# Altium PCB 毛巾架 主板-PCB.PcbDoc
Units mm, origin at the board's own origin, x right, y up, seen from the top; angles counter-clockwise.
Board outline 73.78 x 43 mm, 2 copper layers (Top Layer, Bottom Layer); 75 components, 56 nets, 224 pads, 69 vias.
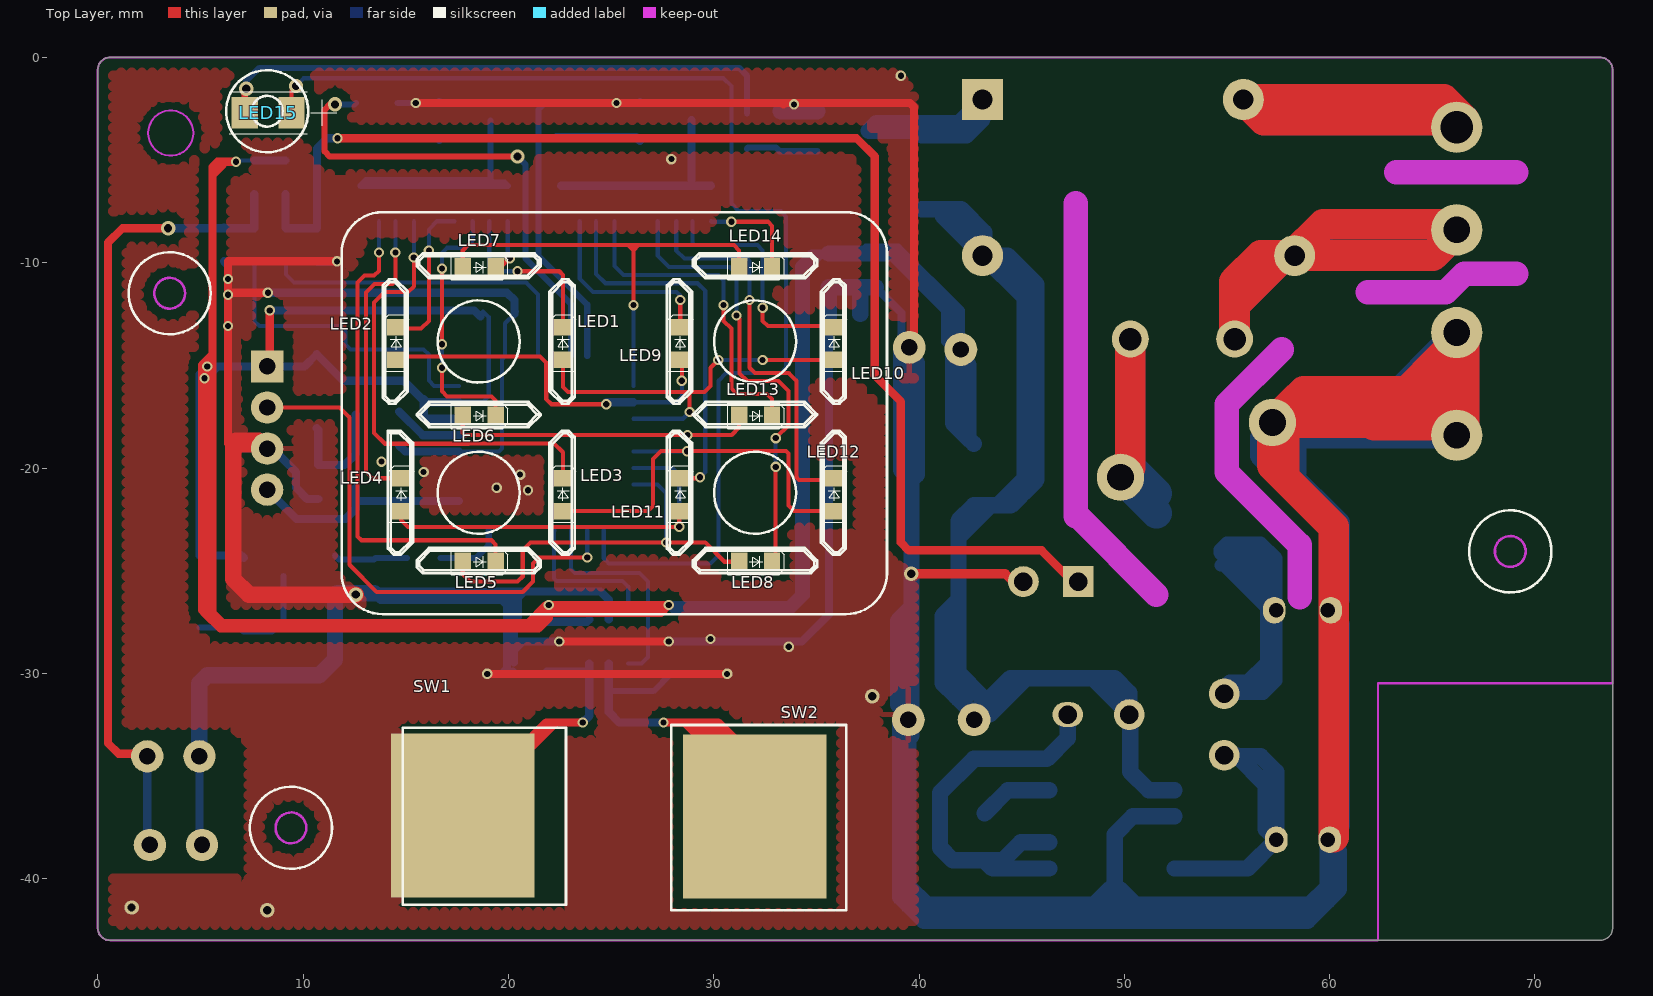
[diagram p0: Top Layer view]
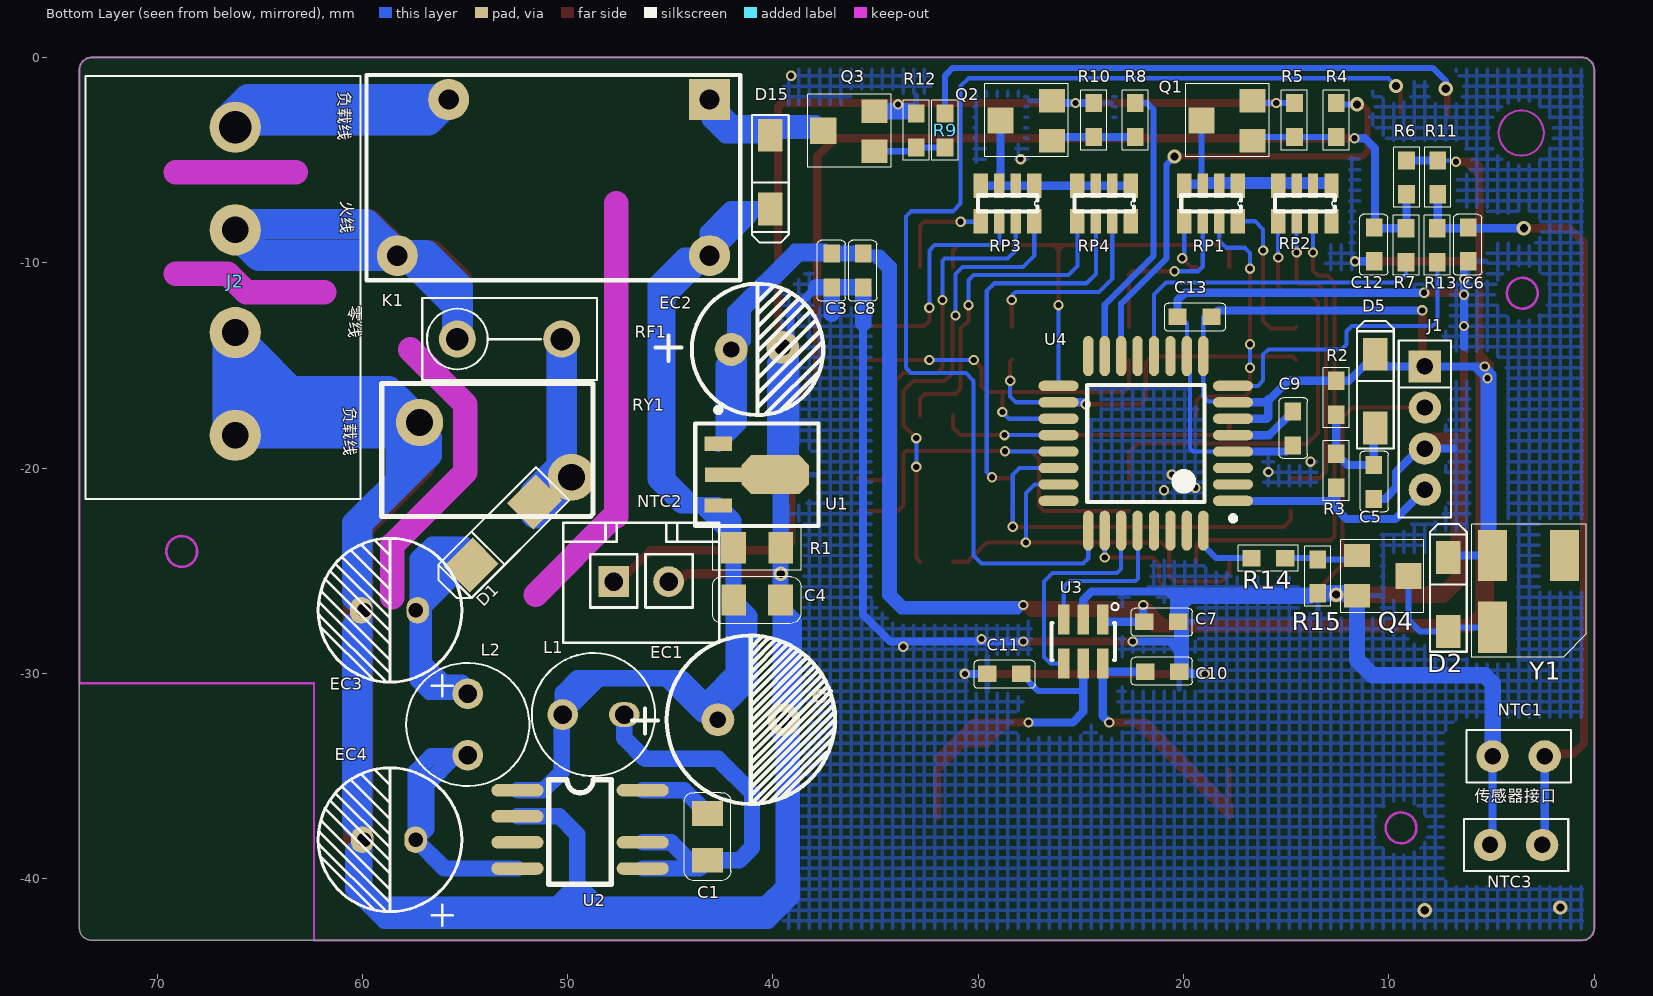
[diagram p1: Bottom Layer view, seen from below]
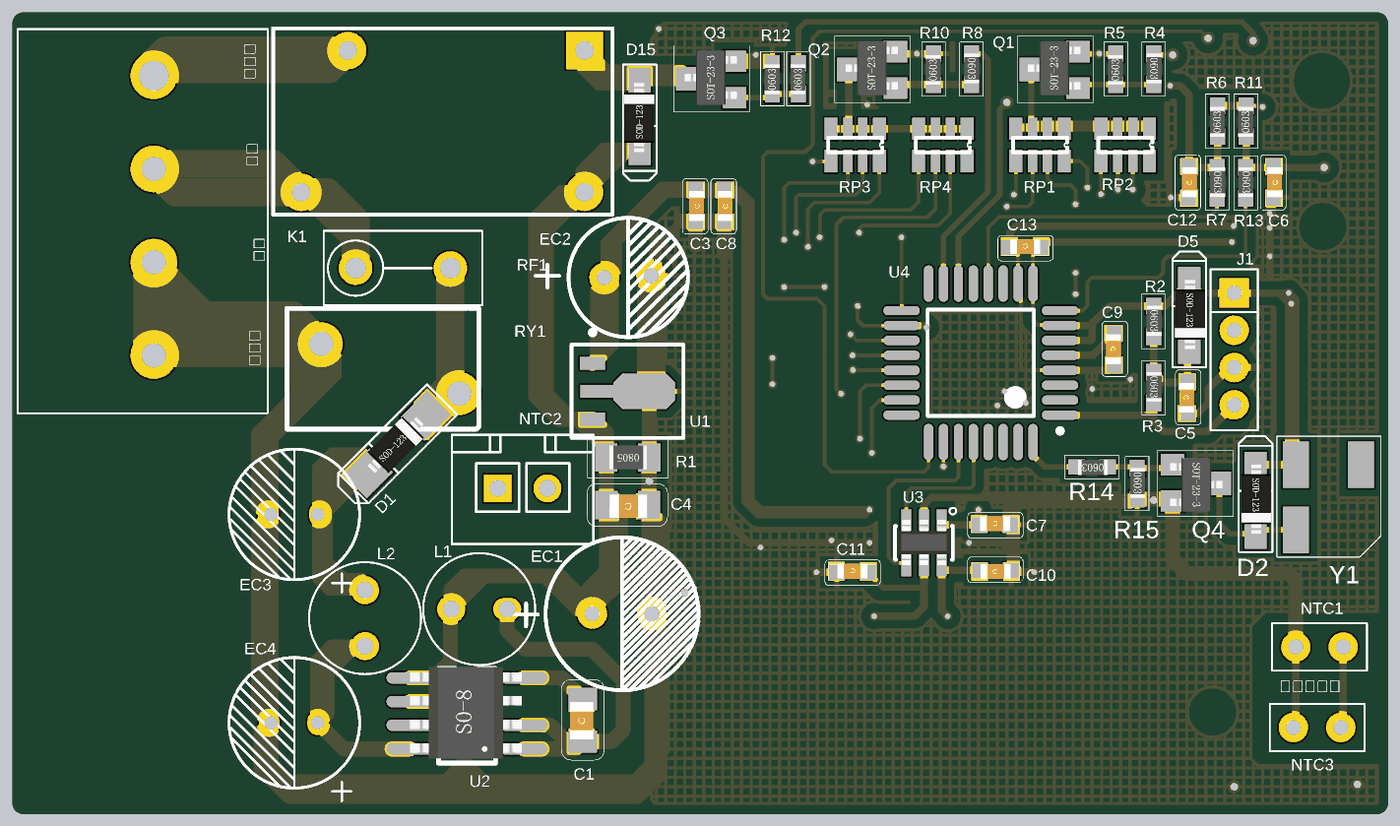
[diagram p2: 3D render of the assembled board from below, using the file's embedded part models]

## Layer stack, top to bottom
Top Layer: signal copper 0.0356
Dielectric: dielectric 0.32, FR-4, Dk 4.8
Bottom Layer: signal copper 0.0356

## Board outline
0,-42.4 ccw(c0.6,-42.4) 0.6,-43 73.178,-43 ccw(c73.178,-42.4) 73.778,-42.4 73.778,-0.6 ccw(c73.178,-0.6) 73.178,0 0.6,0 ccw(c0.6,-0.6) 0,-0.6

## Design rules (kind name [scope] priority, off if disabled: settings)
Clearance Clearance_1 [InPolygon] p1: gap=0.45
Clearance [All] p2: gap=0.2
HoleSize [All] p1 off: absolutevalues=TRUE maxlimit=2.54 minlimit=0.025 maxpercent=80.000 minpercent=20.000
HoleToHoleClearance [All] p1 off: gap=0.254 allowstackedmicrovias=TRUE
LayerPairs [All] p1 off: enforce=TRUE
MinimumSolderMaskSliver [All] p1 off: minsoldermaskwidth=0.254
NetAntennae [All] p1 off: netantennaetolerance=0
PolygonConnect PolygonConnect_1 [IsVia] p1: connectstyle=Direct reliefconductorwidth=0.254 reliefentries=4 polygonreliefangle="90 Angle"
PolygonConnect [All] p2: connectstyle=Relief reliefconductorwidth=0.254 reliefentries=4 polygonreliefangle="90 Angle"
RoutingVias [All] p1: holewidth=0.711 width=1.27 viastyle="Through Hole" minholewidth=0.711 minwidth=1.27 maxholewidth=0.711 maxwidth=1.27
SilkToSilkClearance [All] p1 off: silktosilkclearance=0.254
SilkscreenOverComponentPads [All] p1 off: minsilkscreentomaskgap=0.254
SolderMaskExpansion [All] p1: expansion=0.102
Width [All] p1: maxlimit=1.5 minlimit=0.17 preferedwidth=0.4
21 further rules are at their usual default settings.

## Components (designator, comment, footprint, x,y, rotation, side; value= is the part's Value field where it differs from the comment)
C1 "1uF/0805" CAP/SMT/0805C 43.18,-39.116 r90 bottom
C3 "0.1uF/0603" CAP/SMT/0603C 37.084,-11.176 r90 bottom
C4 "1uF/0805" CAP/SMT/0805C 39.624,-26.416 r0 bottom
C5 "0.1uF/0603" CAP/SMT/0603C 10.795,-19.876 r270 bottom
C6 "0.1uF/0603" CAP/SMT/0603C 6.096,-9.906 r90 bottom
C7 "1uF/0603" CAP/SMT/0603C 20.289,-27.432 r0 bottom
C8 "0.1uF/0603" CAP/SMT/0603C 35.56,-11.176 r90 bottom
C9 "0.1uF/0603" CAP/SMT/0603C 14.732,-17.272 r270 bottom
C10 "0.1uF/0603" CAP/SMT/0603C 21.844,-29.972 r180 bottom
C11 "0.1uF/0603" CAP/SMT/0603C 27.94,-29.972 r0 bottom
C12 "0.1uF/0603" CAP/SMT/0603C 10.668,-9.906 r90 bottom
C13 "0.1uF/0603" CAP/SMT/0603C 18.669,-12.573 r0 bottom
D1 "1N4007-SOD123" D/SMT/SOD123 54.864,-24.892 r135 bottom
D2 "1N4148/SOD-123" D/SMT/SOD-123 7.112,-26.162 r270 bottom
D5 "1N4148/SOD-123" D/SMT/SOD-123 10.668,-16.256 r270 bottom
D15 "1N4148/SOD-123" D/SMT/SOD-123 40.132,-5.588 r90 bottom
EC1 "AEC/220uF/25V" CAP/DIP/330UF/25V 42.672,-32.258 r180 bottom
EC2 "100uF/25V" CAP/DIP/100uF/25V 42.037,-14.224 r180 bottom
EC3 "2.2uF/400V" CAP/DIP/2.2UF/400V/2.5mm#1 57.404,-26.924 r90 bottom
EC4 "2.2uF/400V" CAP/DIP/2.2UF/400V/2.5mm#2 57.404,-38.1 r90 bottom
J1 "CON/DIP/1X4PIN/2MM" CON/DIP/1×4PIN/2.0MM 8.255,-15.05 r270 bottom
J2 "1X4PIN" CON/DIP/1×4PIN/5.0MM/WJ103-4P 66.189,-10.9 r270 bottom
K1 "HF32F/012-HSL" RELAY/HF32F-012-HSL 58.293,-9.652 r90 bottom
L1 "1mH" L/DIP/1mH#1 47.244,-32.004 r0 bottom
L2 "1mH" L/DIP/1mH#2 54.864,-30.988 r270 bottom
LED1 "WEJT61RC-871/0603" D/SMT/LED/0603 22.606,-13.207 r270 top
LED2 "WEJT61RC-871/0603" D/SMT/LED/0603 14.478,-13.207 r270 top
LED3 "WEJT61RC-871/0603" D/SMT/LED/0603 22.606,-20.573 r270 top
LED4 "WEJT61RC-871/0603" D/SMT/LED/0603 14.732,-20.573 r270 top
LED5 "WEJT61RC-871/0603" D/SMT/LED/0603 19.304,-24.511 r180 top
LED6 "WEJT61RC-871/0603" D/SMT/LED/0603 19.304,-17.399 r180 top
LED7 "WEJT61RC-871/0603" D/SMT/LED/0603 19.304,-10.16 r180 top
LED8 "WEJT61RC-871/0603" D/SMT/LED/0603 32.766,-24.511 r180 top
LED9 "WEJT61RC-871/0603" D/SMT/LED/0603 28.321,-13.207 r270 top
LED10 "WEJT61RC-871/0603" D/SMT/LED/0603 35.814,-13.207 r270 top
LED11 "WEJT61RC-871/0603" D/SMT/LED/0603 28.321,-20.573 r270 top
LED12 "WEJT61RC-871/0603" D/SMT/LED/0603 35.814,-20.573 r270 top
LED13 "WEJT61RC-871/0603" D/SMT/LED/0603 32.766,-17.399 r180 top
LED14 "WEJT61RC-871/0603" D/SMT/LED/0603 32.766,-10.16 r180 top
LED15 "BL-HUF35A-TRB高亮红" D/SMT/LED/0805 7.112,-2.54 r0 top
NTC1 "10K/±1%/B值:3380K/0805" Sensor/S_NTC_DIP 2.413,-34.036 r0 bottom
NTC2 "10K/±1%/B值:3380K/0805" CON/DIP/1×2PIN/2.54MM/插件端子 46.736,-26.67 r90 bottom
NTC3 "10K/±1%/B值:3380K/0805" Sensor/S_NTC_DIP 2.54,-38.354 r0 bottom (schematic designator NTC1)
Q1 "NPN_SS8050" BJT/SMT/SOT-23 16.637,-4.064 r90 bottom
Q2 "NPN_SS8050" BJT/SMT/SOT-23 26.416,-4.064 r90 bottom
Q3 "NPN_SS8050" BJT/SMT/SOT-23 35.052,-4.572 r90 bottom
Q4 "NPN_BC817" BJT/SMT/SOT-23 11.557,-24.257 r270 bottom
R1 "4.7K//1%/0805" 0805R 39.624,-23.876 r0 bottom
R2 "10K/0603" 0603R 12.573,-16.574 r270 bottom
R3 "430R/0603" 0603R 12.573,-20.13 r270 bottom
R4 "10K/0603" 0603R 12.573,-3.048 r270 bottom
R5 "10K/0603" 0603R 14.605,-3.048 r90 bottom
R6 "10K/0603" 0603R 9.144,-5.842 r90 bottom
R7 "430R/0603" 0603R 9.167,-9.144 r270 bottom
R8 "10K/0603" 0603R 22.352,-3.048 r270 bottom
R9 "4.7K/0603" 0603R 31.623,-3.556 r90 bottom
R10 "10K/0603" 0603R 24.384,-3.048 r90 bottom
R11 "10K/0603" 0603R 7.62,-5.842 r90 bottom
R12 "4.7K/0603" 0603R 33.02,-3.556 r90 bottom
R13 "430R/0603" 0603R 7.643,-9.144 r270 bottom
R14 "10K/0603" 0603R 15.875,-24.384 r0 bottom
R15 "10K/0603" 0603R 13.462,-25.273 r270 bottom
RF1 "100R/2W" FUSE/3.15A 50.292,-13.716 r0 bottom
RP1 "1K/0603/1/8W/±5%" 0603R*4 18.669,-7.112 r0 bottom
RP2 "1K/0603/1/8W/±5%" 0603R*4 14.097,-7.112 r0 bottom
RP3 "1K/0603/1/8W/±5%" 0603R*4 28.575,-7.112 r0 bottom
RP4 "1K/0603/1/8W/±5%" 0603R*4 23.876,-7.112 r0 bottom
RY1 "TDK471KD10" RES/RY/TDK471KD10 57.912,-17.78 r180 bottom
SW1 "TOUCH" SWITCH/TOUCH-2#1 17.907,-34.163 r90 top
SW2 "TOUCH" SWITCH/TOUCH-2#2 32.131,-33.909 r90 top
U1 "L78L05" SOT-89-3L(78L05) 42.672,-18.796 r270 bottom
U2 "PN8507" SOP-7 49.784,-38.1 r180 bottom
U3 "BS812" SOT23-6 24.892,-28.448 r180 bottom
U4 "STM8S005K6T6TR" LQFP32 21.844,-18.796 r0 bottom locked
Y1 "SYT-0502" SYT-5020 4.953,-24.257 r0 bottom

## Footprints (in the part's own frame and the unit in brackets; to place one, negate y for a bottom-side part, rotate by r counter-clockwise, add the part's x,y. Pads: shape width x height; smd on the part's side, far side on the other; paste and mask are expansions set on the pad)
0603R [mil]
  rect 35x32 smd: 1(-32.5,0) 2(32.5,0)
  silkscreen extent -58,-25 58,25, body extent -33,-15 30,16, height 18
0603R*4 [mm]
  rect 0.7x1.2 smd: 1(-1.3,-0.865) 4(1.3,-0.865) 5(1.3,0.865) 8(-1.3,0.865)
  rect 0.5x1.2 smd: 2(-0.4,-0.865) 3(0.4,-0.865) 6(0.4,0.865) 7(-0.4,0.865)
  silkscreen extent -1.45,-0.4 1.45,0.4
0805R [mm]
  rect 1.2x1.524 smd: 1(0,0) 2(2.3,0)
  silkscreen extent -1,-1.1 3.3,1.1, body extent 0.13,-0.64 2.13,0.62, height 0.55
BJT/SMT/SOT-23 [mm] "transistor 1base 2emitter 3collector"
  rect 1.143x1.27 smd: 1(0,0) 2(1.95,0)
  rect 1.27x1.27 smd: 3(1,2.5)
  silkscreen extent -0.78,-0.8 2.78,3.26, body extent -0.38,-0.13 2.52,2.67, height 1.2
CAP/DIP/2.2UF/400V/2.5mm#1 [mm] "R=4.1MM  脚间距:3.2mm"
  oval 1.3x1.1 hole 0.7 copper offset 0,-0.1: 1(0,0)
  oval 1.3x1.1 hole 0.7 copper offset 0,0.15: 2(0,2.5)
  silkscreen extent -4.19,-2.25 3.5,4.75
CAP/DIP/2.2UF/400V/2.5mm#2 [mm] "R=4.1MM  脚间距:3.2mm"
  oval 1.3x1.1 hole 0.7: 1(0,0)
  oval 1.3x1.1 hole 0.7 copper offset 0,0.1: 2(0,2.5)
  silkscreen extent -4.19,-2.25 3.5,4.75
CAP/DIP/100uF/25V [mm]
  round 1.6 hole 0.8: 1(0,0) 2(2.515,0.102)
  silkscreen extent -3.68,-3.19 4.49,3.2
CAP/DIP/330UF/25V [mm] "R=4.1MM  脚间距:3.2mm"
  round 1.6 hole 0.8: 1(-0.009,0.004) 2(3.191,0.004)
  silkscreen extent -4.19,-4.1 5.69,4.1
CAP/SMT/0603C [mil]
  rect 35x32 smd: 1(-1,1.97) 2(64,1.97)
  silkscreen extent -28,-24 89,30, body extent -20,-20 82,19, height 35
CAP/SMT/0805C [mm]
  rect 1.2x1.524 smd: 1(0.01,0.01) 2(2.296,0.01)
  silkscreen extent -0.99,-1.13 3.32,1.15, body extent -0.38,-0.64 2.62,0.76, height 0.93
CON/DIP/1×2PIN/2.54MM/插件端子 [mm]
  rect 1.5x1.5 hole 0.9: 1(1.143,1.016)
  round 1.5 hole 0.9: 2(1.143,-1.651)
  silkscreen extent -1.84,-4.13 4.01,3.47
CON/DIP/1×4PIN/2.0MM [mil]
  rect 62x62 hole 31.5 mask+4: 1(0,0)
  round 62 hole 31.5 mask+4: 2(78.74,0) 3(157.48,0) 4(236.22,0)
  silkscreen extent -50,-50 290,50
CON/DIP/1×4PIN/5.0MM/WJ103-4P [mm]
  round 2.5 hole 1.6: 1(-7.5,0)
  round 2.5 hole 1.3: 2(-2.5,0) 3(2.5,0) 4(7.5,0)
  silkscreen extent -10,-7.3 10.6,6.1
D/SMT/LED/0603 [mm]
  rect 0.8x0.9 smd: 1(-0.076,0.051) 2(1.524,0.051)
  silkscreen extent -0.68,-0.55 2.07,0.68
D/SMT/LED/0805 [mil]
  rect 50x60 smd: 1(2,-6) 2(92,-6)
  silkscreen extent -28,-46 178,34
D/SMT/SOD123 [mm]
  rect 2x1.8 smd: 1(0.229,0) 2(4.597,0)
  silkscreen extent -1.4,-1.14 5.84,1.14, body extent 0.21,-2.11 4.51,2.19, height 1.2
D/SMT/SOD-123 [mm]
  rect 1.6x1.2 smd: 1(-1.8,0) 2(1.8,0)
  silkscreen extent -3.43,-0.9 2.78,0.9, body extent -1.91,-0.76 1.79,0.84, height 1.2
FUSE/3.15A [mm]
  round 1.8 hole 1.1: 1(0,0) 2(5.08,0)
  silkscreen extent -1.71,-2 6.79,2
L/DIP/1mH#1 [mm]
  oval 1.5x1.2 hole 0.9: 1(0,0)
  round 1.5 hole 0.9: 2(3,0)
  silkscreen extent -1.5,-3 4.5,3
L/DIP/1mH#2 [mm]
  round 1.5 hole 0.9: 1(0,0) 2(3,0)
  silkscreen extent -1.5,-3 4.5,3
LQFP32 [mm]
  oval 1.95x0.5 smd: 1(-4.25,2.8) 2(-4.25,2) 3(-4.25,1.2) 4(-4.25,0.4) 5(-4.25,-0.4) 6(-4.25,-1.2) 7(-4.25,-2) 8(-4.25,-2.8) 17(4.25,-2.8) 18(4.25,-2) 19(4.25,-1.2) 20(4.25,-0.4) 21(4.25,0.4) 22(4.25,1.2) 23(4.25,2) 24(4.25,2.8)
  oval 0.5x1.95 smd: 9(-2.8,-4.25) 10(-2,-4.25) 11(-1.2,-4.25) 12(-0.4,-4.25) 13(0.4,-4.25) 14(1.2,-4.25) 15(2,-4.25) 16(2.8,-4.25) 25(2.8,4.25) 26(2,4.25) 27(1.2,4.25) 28(0.4,4.25) 29(-0.4,4.25) 30(-1.2,4.25) 31(-2,4.25) 32(-2.8,4.25)
  silkscreen extent -4.37,-2.85 2.85,3.77
RELAY/HF32F-012-HSL [mm] "L×W×H（20.5*7.2*15.3MM）"
  round 2 hole 0.991: 1(7.6,-2.5) 2(0,0) 3(0,-15.2)
  rect 2x2 hole 0.991: 4(7.6,-15.2)
  silkscreen extent -1.2,-16.7 8.8,1.5
RES/RY/TDK471KD10 [mm]
  round 2.3 hole 1.3: 1(0.7,0) 2(8.1,-2.667)
  silkscreen extent -1.14,-4.57 9.14,1.91
Sensor/S_NTC_DIP [mil] "插件NTC封装 脚间距2.54mm"
  round 62 hole 31.5 mask+4: 1(0,0) 2(100,0)
  silkscreen extent -50,-50 150,50
SOP-7 [mil]
  oval 100x24 smd: 1(-104.73,94.83) 2(-104.73,44.83) 3(-104.73,-5.17) 4(-104.73,-55.17) 5(135.27,-55.17) 6(135.27,-5.17) 7(135.27,94.83)
  silkscreen extent -45,-85 75,115, body extent -105,-75 131,118, height 67
SOT23-6 [mm] "SOT-23/SC-74A; 5 Leads; Body 3.1 x 3 mm, inc. leads (LxW max)"
  rect 0.55x1.45 smd: 1(0.95,1.075) 2(0,1.075) 3(-0.95,1.075) 4(-0.95,-1.075) 5(0,-1.075) 6(0.95,-1.075)
  silkscreen extent -1.55,-0.9 1.72,1.88, body extent -1.4,-1.19 1.4,1.23, height 1.08
SOT-89-3L(78L05) [mm] "SOT-89; Body 4.6 x 4.25 mm, inc. leads (LxW max)"
  rect 0.7x1.35 smd: 1(0.024,0.009) 3(3.024,0.009)
  rect 0.7x1.8 smd: 2(1.524,0.254)
  oct 1.9x3.3 smd: 2(1.524,2.785)
  silkscreen extent -1.75,-1.12 4.02,4.88
SWITCH/TOUCH-2#1 [mm]
  rect 8x7 smd: 1(-2.754,0.127)
  silkscreen extent -7.11,-4.9 1.52,3.05
SWITCH/TOUCH-2#2 [mm]
  rect 8x7 smd: 1(-3.054,0.127)
  silkscreen extent -7.62,-4.32 1.4,4.19
SYT-5020 [mm]
  rect 1.4x2.5 smd: 1(0,0) 2(0,3.5) 3(-3.5,0)
  silkscreen extent -4.57,-1.52 1.02,4.95

## Part data
C1 C4: library part CAP/CAP/SMT/0805C
C3 C5 C6 C7 C8 C9 C10 C11 C12 C13: library part CAP/CAP/SMT/0603C
D1: library part D/D/SMT/1N4007-SOD123
D2 D5 D15: library part D/D/SMT/1N4148/SOD-123, "VR=75V T(-65-175)P(0.5W)VF=0.6V"
EC1: library part CAP/AEC/DIP/330uF/25V
EC2: library part CAP/AEC/DIP/100uF/25V
EC3 EC4: library part CAP/AEC/DIP/2.2uF/400V
J1: "Connector"
J2: library part CON/DIP/1X4PIN/5.08MM, "Connector"
K1: library part RELAY/GENERAL/DIP/HF32F/012-HSL
L1 L2: library part L/L/DIP/JYGX68-1.0mH/300mA, "工字电感"
LED1 LED2 LED3 LED4 LED5 LED6 LED7 LED8 LED9 LED10 LED11 LED12 LED13 LED14: library part D/LED/SMT/WEJT61RC-871/0603
LED15: library part D/LED/SMT/BL-HUF35A-TRB高亮红/0805
NTC1 NTC2 NTC3: library part SENSOR/NTC_SMD, "3380(10K)"
Q1 Q2: library part BJT/NPN/SMT/SS8050/SOT-23, "Vce25V/Vcb40V/Veb5V/Ic1.5V/Pd300mW"
Q3: library part BJT/NPN/SMT/SS8050/SOT-23
Q4: library part BJT/NPN/SMT/BC817/SOT-23
R1: library part RES/RES/SMT/0805
R2 R3 R4 R5 R6 R7 R8 R9 R10 R11 R12 R13 R14 R15: library part RES/RES/SMT/0603
RF1: library part FUSE/FUSE/DIP/3.15A
RP1 RP2 RP3 RP4: library part "RES /PACKS/SMT/0603*4", "Isolated Resistor Network"
RY1: library part RES/RY/DIP/TDK471KD10
SW1 SW2: library part SWITCH/TOUCH
U1: library part IC/POWER/SMT/L78L05/SOT-89, "5V三端稳压器 output imax 0.1A"
U2: library part IC/POWER/SMT/PN8507/SOP-8
U3: library part IC/POWER/SMT/BS812
U4: library part MCU/SMT/STM8S005K6T6TR/LQFP32
Y1: library part OTHER/BEER/SYT-0502

## Via types
v1: diameter 0.5, hole 0.3, Top Layer to Bottom Layer, tented both sides, 59 vias
v2: diameter 0.7, hole 0.4, Top Layer to Bottom Layer, tented both sides, 10 vias

## Nets (pads, with @x,y where several pads share a name; then routed paths per layer and width w, separated by ;. In a path a pad name is that pad's centre, name@x,y a point inside that pad or via, vN(x,y) a via of type N, cw(c..) or ccw(c..) an arc to the next point about the centre after c; other vN are vias at no path point)
+5V: C3.2 C7.2 C8.2 C13.1 D2.1 D5.1 EC2.1 J1.1 R2.1 R6.2 R11.2 U1.1 U3.1 U4.6 U4.7 U4.9 Y1.1 | length 253.3
  Top Layer w0.4: 5.207,-26.162 5.207,-27.051 ; v1@5.319,-15.05 5.207,-15.162 v1(5.207,-15.621) ; 5.588,-15.24 v1(5.207,-15.621) ; 5.588,-14.478 5.08,-14.986 5.08,-15.875 ; 5.588,-5.715 6.096,-5.207 6.096,-5.08 ; v1(6.731,-5.08) 6.096,-5.08 ; J1.1 8.382,-14.923 v1(8.382,-12.319) ; 21.082,-27.813 21.971,-26.924 ; 21.971,-27.051 27.432,-27.051 v1(27.813,-26.67) 22.479,-26.67 ; 5.08,-15.875 5.334,-15.875 ; 5.08,-15.875 5.08,-15.304 ; 5.08,-15.304 v1(5.334,-15.05) 5.334,-15.875 ; 5.08,-15.304 5.08,-26.924 5.207,-27.051 ; 5.207,-27.051 5.969,-27.813 19.05,-27.813 ; 5.207,-26.67 v1(5.207,-15.621) ; 5.207,-26.67 5.588,-27.051 5.588,-15.621 ; 5.207,-26.67 6.096,-27.559 19.05,-27.559 ; 5.334,-15.875 5.588,-15.621 ; 5.588,-15.621 5.588,-9.398 5.588,-5.334 5.842,-5.08 6.096,-5.08 ; 19.05,-27.813 18.796,-27.813 19.05,-27.559 ; 19.05,-27.813 21.463,-27.813 21.971,-27.305 21.971,-26.924 ; 19.05,-27.559 20.955,-27.559 21.844,-26.67 22.479,-26.67 ; 21.971,-26.924 v1(21.971,-26.67) 22.479,-26.67
  Bottom Layer w0.2: v1(6.731,-5.08) 6.794,-5.016 R11.2 ; U4.7 17.562,-16.764 18.796,-16.764 19.044,-16.516 U4.9 19.044,-12.642 C13.1@18.771,-12.369
  Bottom Layer w0.4: 5.08,-15.304 v1(5.334,-15.05) ; v1@5.334,-15.558 5.842,-15.05 ; D2.1 7.007,-24.257 Y1.1 ; R11.2 R6.2 ; v1(8.382,-12.319) 18.34,-12.319 C13.1 ; 15.875,-16.637 15.875,-16.701 ; U4.6 15.945,-17.596 15.875,-17.526 15.875,-16.891 ; U4.7 15.97,-16.796 ; v1(21.971,-26.67) 21.971,-27.426 C7.2 23.833,-27.482 U3.1 ; 35.179,-9.55 35.179,-9.652 34.48,-10.351 ; Y1.1 4.953,-15.431 v1(5.334,-15.05) ; Y1.1 5.334,-23.876 v1(5.334,-15.05) ; v1(5.334,-15.05) 5.842,-15.05 ; 5.842,-15.05 J1.1 10.074,-15.05 D5.1 11.961,-15.749 R2.1 14.923,-15.749 15.875,-16.701 ; 15.875,-16.891 15.97,-16.796 ; 15.875,-16.891 15.875,-16.701 ; 15.875,-16.701 15.97,-16.796 ; 34.163,-10.668 34.163,-26.162 33.655,-26.67 v1(27.813,-26.67) 28.067,-26.924 33.782,-26.924 34.48,-26.226 34.48,-10.351 ; 34.163,-10.668 34.163,-10.16 34.773,-9.55 C8.2 C3.2 ; 34.163,-10.668 34.48,-10.351 ; C3.2 37.592,-9.55 ; C3.2 37.413,-9.271 38.989,-9.271 42.037,-12.319 42.037,-12.7 ; 37.592,-9.55 38.506,-9.55 38.862,-9.906 ; 37.592,-9.55 38.887,-9.55 42.037,-12.7 ; 37.592,-9.55 37.792,-9.75 38.706,-9.75 38.862,-9.906 ; 38.862,-9.906 41.275,-12.319 ; 41.275,-12.319 41.656,-12.7 EC2.1@41.656,-14.224 ; 41.275,-12.319 41.275,-13.843 EC2.1@41.656,-14.224 ; EC2.1@41.656,-14.224 42.037,-13.843 42.037,-12.7
  Bottom Layer w0.8: C8.2 38.506,-9.55 ; U1.1 U1.1@42.401,-18.559 ; U1.1@42.401,-18.559 41.656,-17.814 41.656,-14.224 42.401,-14.969 U1.1@42.401,-18.559
+12V: C4.2 D15.1 EC1.1 K1.3 L1.2 R1.2 U1.3 U2.1 | length 94.2
  Bottom Layer w0.8: D15.1 41.148,-7.388 ; 41.656,-7.388 43.093,-8.825 K1.3 ; R1.2@41.924,-23.368 43.472,-21.82 43.839,-21.82 ; 42.291,-31.115 41.788,-31.115 41.144,-30.471 ; 45.085,-21.209 45.72,-20.574 45.72,-19.558 ; 45.148,-11.707 K1.3 ; 45.148,-11.049 43.751,-9.652 K1.3 ; 45.466,-20.828 44.474,-21.82 U1.3 ; 45.847,-30.226 45.212,-30.226 43.438,-32 EC1.1@42.681,-32 ; U2.1 51.185,-35.691 50.292,-34.798 50.292,-32.052 L1.2 ; 41.144,-30.471 41.92,-29.695 41.92,-29.083 ; 41.144,-30.471 41.144,-27.202 C4.2 ; 41.148,-7.388 41.148,-7.707 K1.3 ; 41.148,-7.388 42.059,-7.388 43.18,-8.509 43.18,-9.565 K1.3 ; 41.92,-29.083 41.92,-29.982 43.053,-31.115 43.053,-31.628 EC1.1@42.681,-32 ; 41.92,-29.083 41.92,-31.239 EC1.1@42.681,-32 ; 41.92,-29.083 C4.2 ; C4.2 41.924,-26.422 R1.2 41.924,-22.559 U1.3 ; U1.3 43.839,-21.82 ; EC1.1@42.681,-32 44.455,-30.226 48.514,-30.226 ; K1.3 44.323,-9.652 ; 43.839,-21.82 45.148,-20.511 ; 44.323,-9.652 45.148,-10.477 45.148,-20.511 ; 44.323,-9.652 45.72,-11.049 45.72,-19.558 ; 45.148,-20.511 45.72,-19.939 45.72,-19.558 ; 48.514,-30.226 48.514,-30.274 L1.2 ; 48.514,-30.226 49.53,-30.226 50.244,-30.94 L1.2
ADINSIDE: R7.2 U4.12 | length 16.5
  Bottom Layer w0.2: R7.2@9.167,-10.183 R7.2 9.167,-10.564 9.567,-10.964 20.87,-10.964 21.444,-11.538 U4.12
ADOUTSIDE: R13.2 U4.8 | length 15.2
  Bottom Layer w0.2: R13.2 7.643,-12.85 7.874,-13.081 11.811,-13.081 12.065,-13.335 12.065,-13.97 12.319,-14.224 15.875,-14.224 16.129,-14.478 16.129,-15.494 16.129,-15.742 16.383,-15.996 U4.8
BEER: R14.2 U4.32 | length 3.3
  Bottom Layer w0.3: R14.2 18.415,-24.384 19.044,-23.755 U4.32
COM1: R4.1 U4.14 | length 23.9
  Top Layer w0.3: v2(11.557,-2.286) 11.303,-2.286 11.049,-2.54 11.049,-4.572 11.303,-4.826 v2(20.447,-4.826)
  Bottom Layer w0.3: v2(11.557,-2.286) 12.509,-2.286 R4.1 ; v2@20.511,-4.889 20.828,-5.207 20.828,-9.779 23.044,-11.995 U4.14
COM2: R8.1 U4.15 | length 14
  Bottom Layer w0.3: R8.1 21.78,-2.222 21.463,-2.54 21.463,-9.652 23.844,-12.033 U4.15
GND: C3.1 C4.1 C5.2 C6.1 C7.1 C8.1 C9.2 C10.2 C11.2 C12.1 C13.2 EC1.2 EC2.2 EC3.2 EC4.2 J1.3 J2.3 J2.4 NTC1.2 NTC2.2 Q1.2 Q2.2 Q3.2 Q4.2 R1.1 R5.2 R10.2 R12.2 R15.2 RY1.1 U1.2 U2.2 U3.2 U4.4 U4.10 | length 507.1
  Top Layer w0.2: v1@15.43,-2.159 v1(15.494,-2.222)
  Top Layer w0.4: J1.3 6.604,-19.05 6.35,-18.796 v1(6.35,-11.557) ; v1(8.289,-11.464) 6.443,-11.464 v1(6.35,-11.557) ; v1(11.659,-9.931) 6.35,-9.931 v1(6.35,-11.557) ; v1(15.494,-2.222) v1(25.273,-2.222) 33.337,-2.222 ; v1(18.973,-30.022) v1(30.657,-30.022) ; v1(22.479,-28.448) v1(27.813,-28.448) ; 33.401,-2.286 33.337,-2.222 ; EC2.2@39.141,-14.122 39.751,-13.513 39.751,-2.413 39.56,-2.222 33.337,-2.222
  Top Layer w0.45: v2(39.624,-25.146) 44.196,-25.146 44.831,-25.781 NTC2.2@45.212,-25.781
  Top Layer w0.8: J1.3 7.874,-18.669 6.731,-18.669 6.604,-18.796 6.604,-25.4 7.366,-26.162 v2(12.573,-26.162)
  Top Layer w1.5: RY1.1@57.785,-17.207 57.785,-20.447 ; EC4.2@60.198,-37.973 60.198,-22.86 57.785,-20.447 ; 62.164,-17.78 RY1.1 ; 62.164,-16.891 62.004,-16.731 ; 63.754,-16.256 65.341,-14.668 ; J2.4@65.659,-17.907 J2.4@65.341,-17.59 ; J2.4@66.548,-18.288 J2.3@66.548,-13.208 ; J2.4@66.548,-17.907 62.164,-17.907 62.164,-16.256 ; 66.548,-16.256 62.164,-16.256 ; J2.3@66.548,-13.462 65.341,-14.668 ; RY1.1 57.212,-19.874 57.785,-20.447 ; RY1.1 58.261,-16.731 ; 58.261,-16.731 58.736,-16.256 62.164,-16.256 ; 58.261,-16.731 62.004,-16.731 ; 62.004,-16.731 62.863,-17.59 J2.4@65.341,-17.59 ; J2.4@65.341,-17.59 65.341,-14.668
  Bottom Layer w0.2: U4.4 19.539,-19.196 19.685,-19.05 19.685,-14.705 U4.10 19.844,-12.947 C13.2@20.295,-12.496 ; C13.2 C13.2@20.295,-12.496 ; C13.2@20.422,-12.369 C13.2@20.295,-12.496
  Bottom Layer w0.3: R5.2 v1(15.494,-2.222) 16.528,-2.222 Q1.2 ; Q2.2@26.307,-2.222 Q2.2
  Bottom Layer w0.4: NTC1.2 4.953,-38.227 5.08,-38.354 ; C6.1 6.35,-10.135 v1(6.35,-10.795) 6.35,-14.097 ; 6.858,-19.05 J1.3 ; 7.366,-19.05 J1.3 ; v1(8.289,-11.464) 19.939,-11.464 20.295,-11.82 C13.2@20.295,-12.496 ; C12.1 v1(11.659,-9.931) ; C5.2 10.199,-21.502 9.652,-20.955 9.652,-20.193 8.509,-19.05 J1.3 ; C9.2 14.98,-19.196 U4.4 ; v1(18.973,-30.022) 20.118,-30.022 C10.2 ; 19.177,-26.416 19.431,-26.162 ; 19.685,-30.022 19.939,-29.768 19.939,-26.67 19.685,-26.416 20.091,-26.416 ; 20.091,-26.67 20.218,-26.797 20.218,-27.482 20.46,-27.241 20.46,-26.302 ; 20.264,-29.464 20.264,-28.448 ; 20.264,-28.885 20.701,-28.448 ; C7.1 20.264,-28.448 ; 20.499,-26.262 20.399,-26.162 19.431,-26.162 ; v1(22.479,-28.448) 20.701,-28.448 ; R10.2 v1(25.273,-2.222) Q2.2@26.307,-2.222 ; U3.2 24.892,-26.416 24.484,-26.008 20.753,-26.008 ; v1(27.813,-28.448) 34.29,-28.448 35.61,-27.128 C8.1 C3.1 37.897,-11.201 39.141,-12.446 EC2.2@39.141,-14.122 ; C11.2 v1(30.657,-30.022) ; 19.431,-26.162 19.585,-26.008 19.812,-26.008 ; 19.812,-26.008 20.753,-26.008 ; 19.812,-26.008 13.553,-26.008 R15.2 13.779,-26.416 20.091,-26.416 ; 20.091,-26.416 20.218,-26.543 20.46,-26.302 ; 20.264,-28.448 20.701,-28.448 ; 20.46,-26.302 20.753,-26.008
  Bottom Layer w0.8: NTC1.2 4.953,-30.48 5.334,-30.099 10.795,-30.099 11.557,-29.337 Q4.2 11.666,-26.098 R15.2 ; R12.2@33.274,-2.622 Q3.2 ; 35.61,-12.954 C8.1 37.897,-11.201 ; 37.134,-12.496 C3.1 ; EC1.2@39.634,-33.03 39.634,-30.861 ; EC1.2@39.634,-32.161 38.996,-31.523 38.996,-27.425 39.634,-26.787 C4.1 ; EC1.2@39.634,-31.496 39.634,-30.861 ; 48.514,-41.275 49.276,-40.513 ; 49.53,-42.037 49.53,-40.513 ; 50.546,-41.275 49.784,-40.513 49.276,-40.513 ; U2.2 50.415,-36.961 49.53,-37.846 49.53,-40.513 ; 59.904,-40.386 59.015,-41.275 40.386,-41.275 39.481,-40.37 39.481,-40.259 ; EC3.2 60.579,-27.599 60.579,-37.425 EC4.2 ; EC3.2@60.198,-26.797 60.579,-26.416 60.579,-22.606 57.975,-20.002 ; 62.164,-17.653 62.037,-17.78 RY1.1 ; 39.481,-40.259 39.481,-32 39.093,-32.388 39.093,-40.894 40.236,-42.037 ; 39.481,-40.259 39.481,-41.282 40.236,-42.037 ; U1.2@39.624,-20.584 39.141,-20.101 39.141,-14.122 39.887,-14.868 39.887,-20.32 U1.2@39.624,-20.584 ; U1.2@39.624,-20.584 R1.1 39.634,-23.886 C4.1 ; 39.634,-30.861 C4.1 ; 40.236,-42.037 58.928,-42.037 59.182,-41.783 ; 49.276,-40.513 49.53,-40.513 ; 57.212,-20.128 59.904,-22.82 EC4.2 ; 57.212,-20.128 56.515,-19.431 56.515,-18.477 RY1.1 ; 57.212,-20.128 RY1.1 ; RY1.1 57.212,-19.239 57.975,-20.002 ; RY1.1 57.975,-18.544 57.975,-20.002 ; 59.182,-41.783 60.452,-40.513 60.452,-38.648 EC4.2 ; 59.182,-41.783 59.904,-41.061 EC4.2
  Bottom Layer w1.5: RY1.1 58.134,-16.858 ; 58.134,-20.161 58.134,-16.858 ; RY1.1@58.134,-17.78 58.642,-18.288 J2.4@66.548,-18.288 ; 62.164,-16.256 62.164,-17.907 66.548,-17.907 66.548,-13.208 J2.3@65.405,-14.351 ; 63.5,-16.256 J2.3@65.405,-14.351 ; J2.4@65.151,-17.907 J2.4@65.405,-17.653 ; 66.548,-16.256 58.736,-16.256 58.134,-16.858 ; 58.134,-16.858 61.75,-16.858 62.545,-17.653 J2.4@65.405,-17.653 ; J2.4@65.405,-17.653 J2.3@65.405,-14.351
  other v1: 33.655,-28.702 29.845,-28.321 20.955,-21.082 19.431,-20.955 20.574,-20.32 15.875,-20.193 13.822,-19.685 6.35,-13.081 27.94,-4.953 33.909,-2.286 39.116,-0.889
  other v2: 8.255,-41.529 1.651,-41.402 37.719,-31.115
L_LOAD: J2.1 K1.1 | length 47.1
  Top Layer w1.5: K1.1 56.789,-3.048 66.548,-3.048 65.552,-2.052 K1.1
  Bottom Layer w1.5: 57.785,-3.048 56.789,-2.052 K1.1 ; K1.1 65.552,-2.052 66.548,-3.048 56.789,-3.048 K1.1
L_NINE: J2.2 K1.2 RF1.2 | length 55.7
  Top Layer w1.5: RF1.2 55.372,-12.065 ; 55.372,-12.065 57.785,-9.652 58.166,-9.652 59.69,-8.128 66.548,-8.128 65.024,-9.652 56.642,-9.652 55.372,-10.922 55.372,-12.065
  Bottom Layer w1.5: RF1.2 55.372,-11.176 56.896,-9.652 65.024,-9.652 66.548,-8.128 59.817,-8.128 K1.2 57.785,-9.652 55.372,-12.065
LED1: LED6.2 LED13.2 U4.20 | length 17.7
  Top Layer w0.2: LED6.2 17.78,-18.288 17.907,-18.415 17.926,-18.396 v1(28.721,-18.396) 30.88,-18.396 31.242,-18.034 LED13.2
  Bottom Layer w0.2: U4.20 v1(28.721,-18.396)
LED2: LED1.2 LED10.2 U4.19 | length 19.6
  Top Layer w0.2: LED1.2 22.657,-16.053 22.902,-16.298 28.829,-16.298 ; v1(28.829,-17.272) 28.829,-16.298 ; v1(30.226,-14.732) 29.845,-15.113 29.845,-16.002 29.549,-16.298 28.829,-16.298 ; v1(32.385,-14.732) v1(32.385,-14.732) LED10.2
  Bottom Layer w0.2: U4.19 28.505,-17.596 v1(28.829,-17.272) ; v1(30.226,-14.732) v1(32.385,-14.732)
LED3: LED7.2 LED14.2 U4.17 | length 22.9
  Top Layer w0.2: LED7.2 17.78,-9.398 18.034,-9.144 25.781,-9.144 ; v1@26.094,-11.938 26.094,-9.144 ; 26.416,-9.144 26.348,-9.144 26.094,-9.398 25.84,-9.144 25.781,-9.144 ; LED14.2 31.242,-9.398 30.988,-9.144 25.781,-9.144
  Bottom Layer w0.2: U4.17 v1(26.094,-12.065)
LED4: LED5.2 LED8.2 U4.23 | length 20.3
  Top Layer w0.2: LED5.2 17.78,-25.146 18.161,-25.527 20.447,-25.527 20.701,-25.273 20.701,-24.003 21.082,-23.622 v1(27.686,-23.622) 29.591,-23.622 30.531,-24.562 LED8.2
  Bottom Layer w0.2: U4.23 27.273,-20.796 27.686,-21.209 v1(27.686,-23.622)
LED5: LED3.2 LED12.2 U4.21 | length 21.1
  Top Layer w0.2: LED3.2 LED3.2 26.797,-22.098 27.051,-21.844 27.051,-19.558 27.432,-19.177 v1(28.702,-19.177) 33.528,-19.177 33.636,-19.285 33.636,-21.825 33.908,-22.097 LED12.2
  Bottom Layer w0.2: U4.21 v1@28.702,-19.196
LED6: LED4.2 LED11.2 U4.22 | length 19.8
  Top Layer w0.2: LED4.2 14.783,-22.53 15.113,-22.86 v1(28.321,-22.86) 28.321,-22.148 LED11.2
  Bottom Layer w0.2: U4.22 27.997,-19.996 28.321,-20.32 v1(28.321,-22.86)
LED7: LED2.2 LED9.2 U4.18 | length 17.6
  Top Layer w0.2: LED2.2 14.697,-14.563 17.272,-14.563 21.548,-14.563 21.844,-14.859 21.844,-16.637 22.098,-16.891 v1(24.765,-16.891) ; LED9.2 28.448,-14.807 28.448,-15.494
  Bottom Layer w0.2: U4.18 28.162,-16.796 28.448,-16.51 v1(28.448,-15.748)
  Bottom Layer w0.4: v1@24.797,-16.796 U4.18
NetC1_1: C1.1 L1.1 U2.5 U2.6 | length 20.4
  Bottom Layer w0.8: U2.5 43.585,-39.501 C1.1 ; U2.6 44.954,-38.231 44.079,-39.106 C1.1 ; L1.1 47.244,-33.147 46.228,-34.163 42.672,-34.163 41.021,-35.814 41.021,-38.481 41.646,-39.106 C1.1
NetC1_2: C1.2 U2.7 | length 3.6
  Bottom Layer w0.8: C1.2 44.319,-35.691 U2.7
NetC5_1: C5.1 D5.2 R2.2 R3.1 | length 5.8
  Bottom Layer w0.4: D5.2 10.745,-18.133 C5.1 12.027,-19.851 R3.1 R2.2
NetC6_2: C6.2 NTC1.1 R11.1 R13.1 | length 40.1
  Top Layer w0.4: NTC1.1 2.286,-33.909 1.016,-33.909 0.508,-33.401 0.508,-9.017 1.206,-8.319 v2(3.429,-8.319)
  Bottom Layer w0.2: C6.2@6.146,-8.319 C6.2@6.184,-8.319 ; R13.1@7.62,-8.295 R13.1
  Bottom Layer w0.4: NTC1.1 2.413,-38.227 2.54,-38.354 ; v2(3.429,-8.319) C6.2@6.184,-8.319 ; C6.2 C6.2@6.184,-8.319 ; R13.1@7.62,-8.295 R11.1 ; R13.1 C6.2@6.184,-8.319
NetC9_1: C9.1 U4.5 | length 3.4
  Bottom Layer w0.4: C9.1 15.831,-18.396 U4.5
NetC10_1: C10.1 SW1.1 U3.6 | length 23.6
  Top Layer w0.2: SW1.1 SW1.1@17.78,-34.671
  Top Layer w0.4: SW1.1@20.828,-33.528 21.971,-32.385 21.844,-32.385 ; v1(23.622,-32.385) 22.479,-32.385 ; 21.844,-32.385 17.78,-36.449 SW1.1 22.312,-32.385 22.479,-32.385 ; 21.844,-32.385 22.479,-32.385
  Bottom Layer w0.4: C10.1 U3.6@23.892,-29.922 ; v1(23.622,-32.385) 23.942,-32.065 23.942,-29.922 U3.6
NetC11_1: C11.1 SW2.1 U3.5 | length 25.1
  Top Layer w0.4: v1(27.559,-32.385) 28.575,-32.385 ; SW2.1@30.353,-33.401 29.337,-32.385 ; SW2.1@31.242,-33.401 SW2.1@30.099,-33.401 ; SW2.1 32.004,-34.671 29.718,-32.385 ; SW2.1@32.004,-34.163 30.226,-32.385 29.718,-32.385 ; 28.575,-32.385 29.083,-32.385 ; 28.575,-32.385 29.591,-33.401 SW2.1@30.099,-33.401 ; 29.083,-32.385 SW2.1@30.099,-33.401 ; 29.083,-32.385 29.337,-32.385 ; 29.337,-32.385 29.718,-32.385
  Bottom Layer w0.3: 24.892,-30.861 27.076,-30.861 C11.1
  Bottom Layer w0.4: 24.892,-30.988 24.892,-31.877 25.4,-32.385 v1(27.559,-32.385) ; 24.892,-30.861 U3.5
NetC12_2: C12.2 NTC2.1 R6.1 R7.1 | length 63.7
  Top Layer w0.4: v1(11.684,-3.937) 36.957,-3.937 37.846,-4.826 37.846,-15.494 39.116,-16.764 39.116,-23.622 39.497,-24.003 43.307,-24.003 45.974,-24.003 NTC2.1@47.752,-25.781
  Bottom Layer w0.2: R7.1@9.144,-8.295 R7.1 ; C12.2@10.68,-8.319 C12.2
  Bottom Layer w0.4: R7.1@9.144,-8.295 R6.1 ; R7.1 10.68,-8.319 10.68,-4.433 11.176,-3.937 v1(11.684,-3.937)
NetD1_1: D1.1 EC3.1 L2.1 | length 38.6
  Bottom Layer w0.6: D1.1 54.829,-24.73 EC3.1@56.896,-26.797 ; L2.1@55.118,-30.734 56.261,-30.734 56.896,-30.099 56.896,-27.559 ; 56.896,-29.464 56.007,-30.353 55.118,-30.353 54.864,-30.607 L2.1 56.769,-30.988 57.404,-30.353 EC3.1 ; 57.404,-29.464 57.404,-24.384 56.642,-23.622 54.991,-23.622 54.635,-23.978 D1.1@54.635,-24.13 ; D1.1@54.635,-24.13 D1.1@55.143,-24.638 ; D1.1@54.635,-24.13 56.388,-24.13 57.277,-25.019 EC3.1@57.277,-26.797 ; D1.1@55.143,-24.638 55.499,-24.638 56.896,-26.035 ; D1.1@55.143,-24.638 56.261,-24.638 56.896,-25.273 56.896,-26.035 ; 56.896,-27.559 56.896,-26.035 ; 56.896,-27.559 56.896,-27.178 EC3.1@57.277,-26.797 ; EC3.1@57.277,-26.797 EC3.1 ; EC3.1@57.277,-26.797 EC3.1
NetD1_2: D1.2 RF1.1 RY1.2 | length 17.5
  Top Layer w1.5: RY1.2 50.292,-19.967 RF1.1
  Bottom Layer w1.5: RY1.2 D1.2@51.562,-22.197 ; RF1.1 50.292,-19.967 D1.2@51.562,-21.237
NetD2_2: D2.2 Q4.3 Y1.2 | length 6.6
  Bottom Layer w0.3: Y1.2 6.907,-27.757 D2.2 8.487,-27.962 9.057,-27.392 Q4.3
NetD15_2: D15.2 K1.4 Q3.3 | length 15.1
  Bottom Layer w0.8: D15.2 39.916,-3.572 Q3.3 37.919,-3.205 41.94,-3.205 ; D15.2 42.313,-3.788 43.093,-3.008 K1.4 41.94,-3.205 ; D15.2 41.357,-3.788 41.94,-3.205
NetEC4_1: EC4.1 L2.2 U2.4 | length 17.2
  Bottom Layer w0.8: U2.4 56.003,-39.501 EC4.1 ; EC4.1 56.896,-37.592 56.896,-35.433 55.451,-33.988 L2.2 54.912,-34.036 56.642,-34.036 57.404,-34.798 EC4.1
NetLED1_1: LED1.1 RP1.6 | length 8.5
  Top Layer w0.2: v1(20.447,-10.414) 22.479,-10.414 22.657,-10.592 LED1.1
  Bottom Layer w0.2: RP1.6 19.069,-10.179 19.304,-10.414 v1(20.447,-10.414)
NetLED2_1: LED2.1 RP1.8 | length 7.6
  Top Layer w0.2: LED2.1 14.606,-13.208 15.748,-13.208 16.129,-12.827 v1(16.129,-9.398)
  Bottom Layer w0.2: v1(16.129,-9.398) 16.129,-8.382 16.534,-7.977 RP1.8
NetLED3_1: LED3.1 RP2.5 | length 22.7
  Top Layer w0.2: v1(15.397,-9.749) 15.397,-11.146 15.113,-11.43 13.97,-11.43 13.462,-11.938 13.462,-16.256 13.462,-18.288 13.989,-18.815 18.073,-18.815 18.092,-18.796 22.225,-18.796 22.657,-19.228 LED3.1
  Bottom Layer w0.2: v1(15.397,-9.749) RP2.5
NetLED4_1: LED4.1 RP2.6 | length 15.2
  Top Layer w0.2: v1(14.497,-9.506) 14.497,-10.884 14.351,-11.03 13.481,-11.03 13.062,-11.449 13.062,-20.174 13.385,-20.497 LED4.1
  Bottom Layer w0.2: v1(14.497,-9.506) RP2.6
NetLED5_1: LED5.1 RP2.7 | length 23.8
  Top Layer w0.2: v1(13.697,-9.506) 13.697,-10.395 13.462,-10.63 12.992,-10.63 12.662,-10.96 12.662,-23.33 12.846,-23.514 19.177,-23.514 19.38,-23.717 LED5.1
  Bottom Layer w0.2: v1(13.697,-9.506) RP2.7
NetLED6_1: LED6.1 RP1.7 | length 13.7
  Top Layer w0.2: v1(16.764,-15.113) 16.764,-16.256 17.018,-16.51 19.177,-16.51 19.38,-16.713 LED6.1 LED6.1@19.38,-17.221 ; v1(16.764,-13.97) v1(16.764,-10.287)
  Bottom Layer w0.2: v1(16.764,-15.113) v1(16.764,-13.97) ; v1(16.764,-10.287) 16.764,-9.525 17.018,-9.271 17.907,-9.271 18.269,-8.909 RP1.7 RP1.7@18.269,-8.528
NetLED7_1: LED7.1 RP1.5 | length 2.8
  Top Layer w0.2: LED7.1@19.507,-10.211 LED7.1 19.634,-10.211 v1(20.066,-9.779)
  Bottom Layer w0.2: v1@19.969,-9.779 RP1.5
NetLED8_1: LED8.1 RP3.8 | length 22.2
  Top Layer w0.2: v1(31.115,-12.573) 31.261,-12.719 31.261,-15.386 31.642,-15.767 33.166,-15.767 33.636,-16.237 33.636,-17.926 33.542,-18.02 33.542,-18.024 33.366,-18.2 33.362,-18.2 v1(33.02,-18.542) ; LED8.1 33.02,-24.384 v1(33.02,-19.939)
  Bottom Layer w0.2: RP3.8 27.275,-9.652 27.821,-10.198 30.772,-10.198 31.115,-10.541 v1(31.115,-12.573) ; v1(33.02,-19.939) v1(33.02,-18.542)
NetLED9_1: LED9.1 RP4.7 | length 9.6
  Top Layer w0.2: LED9.1 v1(28.372,-11.811)
  Bottom Layer w0.2: RP4.7 23.476,-10.776 24.13,-11.43 28.194,-11.43 28.372,-11.608 v1(28.372,-11.811)
NetLED10_1: LED10.1 RP3.6 | length 11.7
  Top Layer w0.2: v1(32.385,-12.192) 32.385,-12.827 32.638,-13.08 35.814,-13.08 LED10.1
  Bottom Layer w0.2: RP3.6 28.975,-9.036 29.083,-9.144 32.131,-9.144 32.385,-9.398 v1(32.385,-12.192)
NetLED11_1: LED11.1 RP4.6 | length 18.4
  Top Layer w0.2: LED11.1 29.287,-20.497 v1(29.337,-20.447)
  Bottom Layer w0.2: RP4.6 24.276,-10.541 24.733,-10.998 29.21,-10.998 29.591,-11.379 29.591,-20.193 v1(29.337,-20.447)
NetLED12_1: LED12.1 RP3.7 | length 19.7
  Top Layer w0.2: v1@31.75,-11.684 31.75,-13.97 31.75,-15.113 32.004,-15.367 33.655,-15.367 34.036,-15.748 34.036,-20.447 34.163,-20.574 35.788,-20.574 LED12.1
  Bottom Layer w0.2: RP3.7 28.175,-9.398 28.575,-9.798 31.642,-9.798 31.75,-9.906 v1(31.75,-11.811)
NetLED13_1: LED13.1 RP4.5 | length 16.2
  Top Layer w0.2: v1(30.48,-12.065) 30.48,-12.827 30.861,-13.208 30.861,-16.129 31.115,-16.383 32.588,-16.383 32.842,-16.637 LED13.1
  Bottom Layer w0.2: RP4.5 25.176,-10.16 25.614,-10.598 30.226,-10.598 30.48,-10.852 v1(30.48,-12.065)
NetLED14_1: LED14.1 RP3.5 | length 5.1
  Top Layer w0.2: v1(30.861,-8.001) 32.639,-8.001 32.842,-8.204 LED14.1
  Bottom Layer w0.2: RP3.5 29.899,-8.001 v1(30.861,-8.001)
NetLED15_1: LED15.1 R9.2 | length 28.2
  Top Layer w0.3: LED15.1 7.163,-1.6 v2(7.239,-1.524)
  Bottom Layer w0.3: v2(7.239,-1.524) 7.239,-1.143 7.874,-0.508 31.242,-0.508 31.623,-0.889 R9.2
NetQ1_1: Q1.1 R4.2 R5.1 | length 4.1
  Bottom Layer w0.3: R4.2 R5.1 16.447,-3.873 Q1.1
NetQ1_3: Q1.3 RP1.1 RP1.2 RP1.3 RP1.4 RP2.1 RP2.2 RP2.3 RP2.4 | length 19.6
  Bottom Layer w0.3: RP2.3 14.356,-6.106 12.938,-6.106 RP2.1 ; RP1.3 19.137,-6.179 Q1.3 ; RP2.1 14.097,-6.247 RP1.4 19.828,-6.106 19.274,-6.106 19.137,-5.969 13.075,-5.969 RP2.1
NetQ2_1: Q2.1 R8.2 R10.1 | length 4.1
  Bottom Layer w0.4: R8.2 R10.1 26.226,-3.873 Q2.1
NetQ2_3: Q2.3 RP3.1 RP3.2 RP3.3 RP3.4 RP4.1 RP4.2 RP4.3 RP4.4 | length 16.1
  Bottom Layer w0.3: RP4.2 RP4.3 RP4.4 RP3.1 RP3.2 RP3.3 ; Q2.3 Q2.3@28.975,-3.123
  Bottom Layer w0.4: RP4.1 RP4.2 RP4.3 RP4.4 RP3.1 RP3.2 RP3.3 ; Q2.3 28.916,-6.188 RP3.3 ; RP3.4 RP3.3
NetQ3_1: Q3.1 R9.1 R12.1 | length 3.5
  Bottom Layer w0.3: R9.1@31.623,-4.445 31.686,-4.381 R12.1 33.21,-4.572 Q3.1
NetQ4_1: Q4.1 R14.1 R15.1 | length 3.6
  Bottom Layer w0.3: Q4.1 11.747,-24.447 R15.1 13.525,-24.384 R14.1
RELAY1: LED15.2 U4.25 | length 58.5
  Top Layer w0.2: LED15.2 v2@9.449,-1.6 ; v2@9.449,-1.6 v2(9.659,-1.39) v2@9.449,-1.6
  Bottom Layer w0.2: v2(9.659,-1.39) 10.033,-1.016 30.48,-1.016 30.861,-1.397 30.861,-7.112 31.242,-7.493 33.274,-7.493 33.528,-7.747 33.528,-15.113 33.274,-15.367 30.607,-15.367 30.226,-15.748 30.226,-24.257 29.845,-24.638 24.892,-24.638 24.644,-24.39 U4.25
SW1: U3.3 U4.28 | length 7.2
  Bottom Layer w0.2: U4.28 22.225,-23.065 22.225,-25.381 22.352,-25.508 25.569,-25.508 25.842,-25.781 U3.3@25.842,-26.865
SW2: U3.4 U4.27 | length 10.6
  Bottom Layer w0.2: U4.27 23.044,-24.911 23.241,-25.108 26.378,-25.108 26.797,-25.527 26.797,-29.21 26.484,-29.523 U3.4
SWIM: J1.2 U4.26 | length 26
  Top Layer w0.2: J1.2 11.786,-17.05 12.262,-17.526 12.262,-24.708 13.589,-26.035 20.701,-26.035 21.209,-25.527 21.209,-24.638 21.495,-24.352 v1(23.844,-24.352)
  Bottom Layer w0.2: v1(23.844,-24.352) U4.26
TICERST: J1.4 R3.2 U4.1 | length 11.2
  Bottom Layer w0.4: J1.4 9.684,-22.479 12.065,-22.479 12.573,-21.971 R3.2 ; 12.573,-21.596 U4.1
pads on no net: NTC3.1 NTC3.2 RP2.8 RP4.8 U2.3 U4.2 U4.3 U4.11 U4.13 U4.16 U4.24 U4.29 U4.30 U4.31 Y1.3

## Polygon pours and split planes (outlines as drawn)
GND on Bottom Layer "Top Layer-No Net" (hatched 90Degree grid 0.508 track 0.17, remove dead copper, pour order 1001): 0.346,0.087 -0.254,-0.703 -0.254,-42.839 38.862,-42.913 39.497,-42.204 39.497,-1.419 38.354,0.087
GND on Top Layer "Top Layer-No Net" (hatched 90Degree grid 0.508 track 0.508, remove dead copper, pour order 1000): 0.6,-0.249 0,-1.045 0,-43.175 39.116,-43.249 39.751,-42.667 39.751,-1.765 38.608,-0.249

## Keep-outs
Keep-Out Layer:
  circle w0.1: c3.556,-3.683 r1.1
  circle w0.127: c9.411,-37.52 r0.75
  circle w0.127: c3.506,-11.484 r0.75
  circle w0.127: c68.797,-24.058 r0.75
  lines w0.1: 0,-42.4 ccw(c0.6,-42.4) 0.6,-43 62.357,-43 62.357,-30.48 73.778,-30.48 73.778,-0.6 ccw(c73.178,-0.6) 73.178,0 0.6,0 ccw(c0.6,-0.6) 0,-0.6 0,-42.4
  lines w1.2: 47.625,-7.112 47.625,-22.352 47.752,-22.352 51.562,-26.162 ; 57.658,-14.224 54.991,-16.891 54.991,-20.193 58.547,-23.749 58.547,-26.289 ; 61.849,-11.43 65.659,-11.43 66.548,-10.541 69.088,-10.541 ; 63.246,-5.588 69.088,-5.588

## Other copper
Top Layer:
  pour cut-out: 0.254,-32.512 6.477,-32.512 7.366,-33.401 7.366,-40.259 6.731,-40 0.376,-40 0,-39.624 0,-32.385
Bottom Layer:
  pour cut-out: -0.889,-32.131 6.604,-32.131 7.366,-32.893 7.366,-40.005 6.985,-40.386 0.386,-40.386 0,-40 0,-33.02
  pour cut-out: 7.366,-12.7 7.366,-22.225 7.874,-22.733 9.779,-22.733 10.414,-22.098 10.414,-19.177 12.319,-17.272 12.319,-15.494 9.525,-12.7
  pour cut-out: 12.719,-15.894 14.116,-15.894 14.682,-16.46 14.682,-18.898 14.149,-19.431 12.954,-19.431 12.719,-19.196
  pour cut-out: 38.735,-22.86 38.608,-22.987 38.608,-39.624 38.862,-40.005 38.862,-40 40.132,-40 40.005,-30.617 40.005,-22.733 39.116,-22.733 38.989,-22.86
  pour cut-out: 38.227,-2.27 35.576,-2.27 34.925,-2.921 34.925,-3.683 35.433,-4.191 37.211,-4.191 37.211,-3.286
  pour cut-out: 13.081,-1.27 19.939,-1.27 20.574,-1.905 20.574,-5.08 20.32,-5.334 12.039,-5.334 11.912,-5.461 11.912,-2.439
  pour cut-out: 20.955,-12.192 20.955,-11.049 19.812,-9.906 13.335,-9.906 12.573,-10.668 12.573,-11.811 12.954,-12.192

## Silkscreen, mask and mechanical layers (free items; w line width, h text height)
Top Overlay:
  drawing of 350 lines, arcs and shapes, not listed
Bottom Overlay:
  text "负载线" at 61.341,-1.651 h1 r90
  text "火线" at 61.214,-6.985 h1 r90
  text "零线" at 60.833,-12.065 h1 r90
  text "负载线" at 61.087,-17.018 h1 r90
  text "传感器接口" at 5.842,-36.449 h1